# Altium PCB PCB.PcbDoc
Units mm, origin at the board's own origin, x right, y up, seen from the top; angles counter-clockwise.
Board outline 75.18 x 42.55 mm, 2 copper layers (Top Layer, Bottom Layer), stack 1.571 mm thick; 57 components, 44 nets, 199 pads, 75 vias.
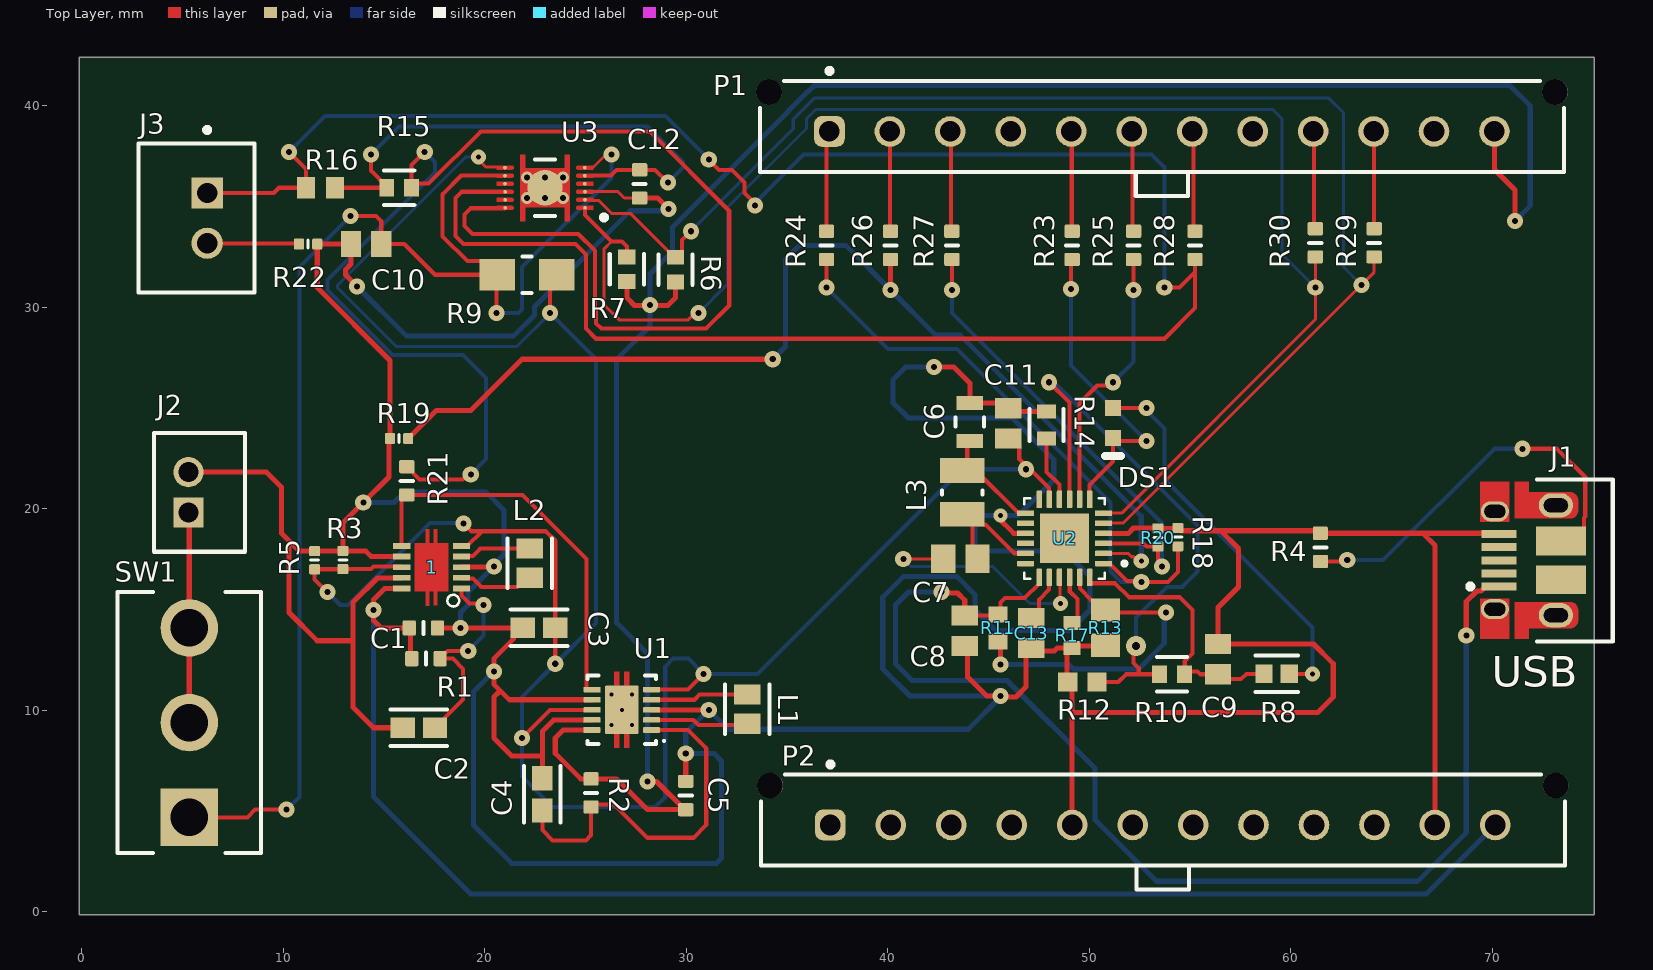
[diagram p0: Top Layer view]
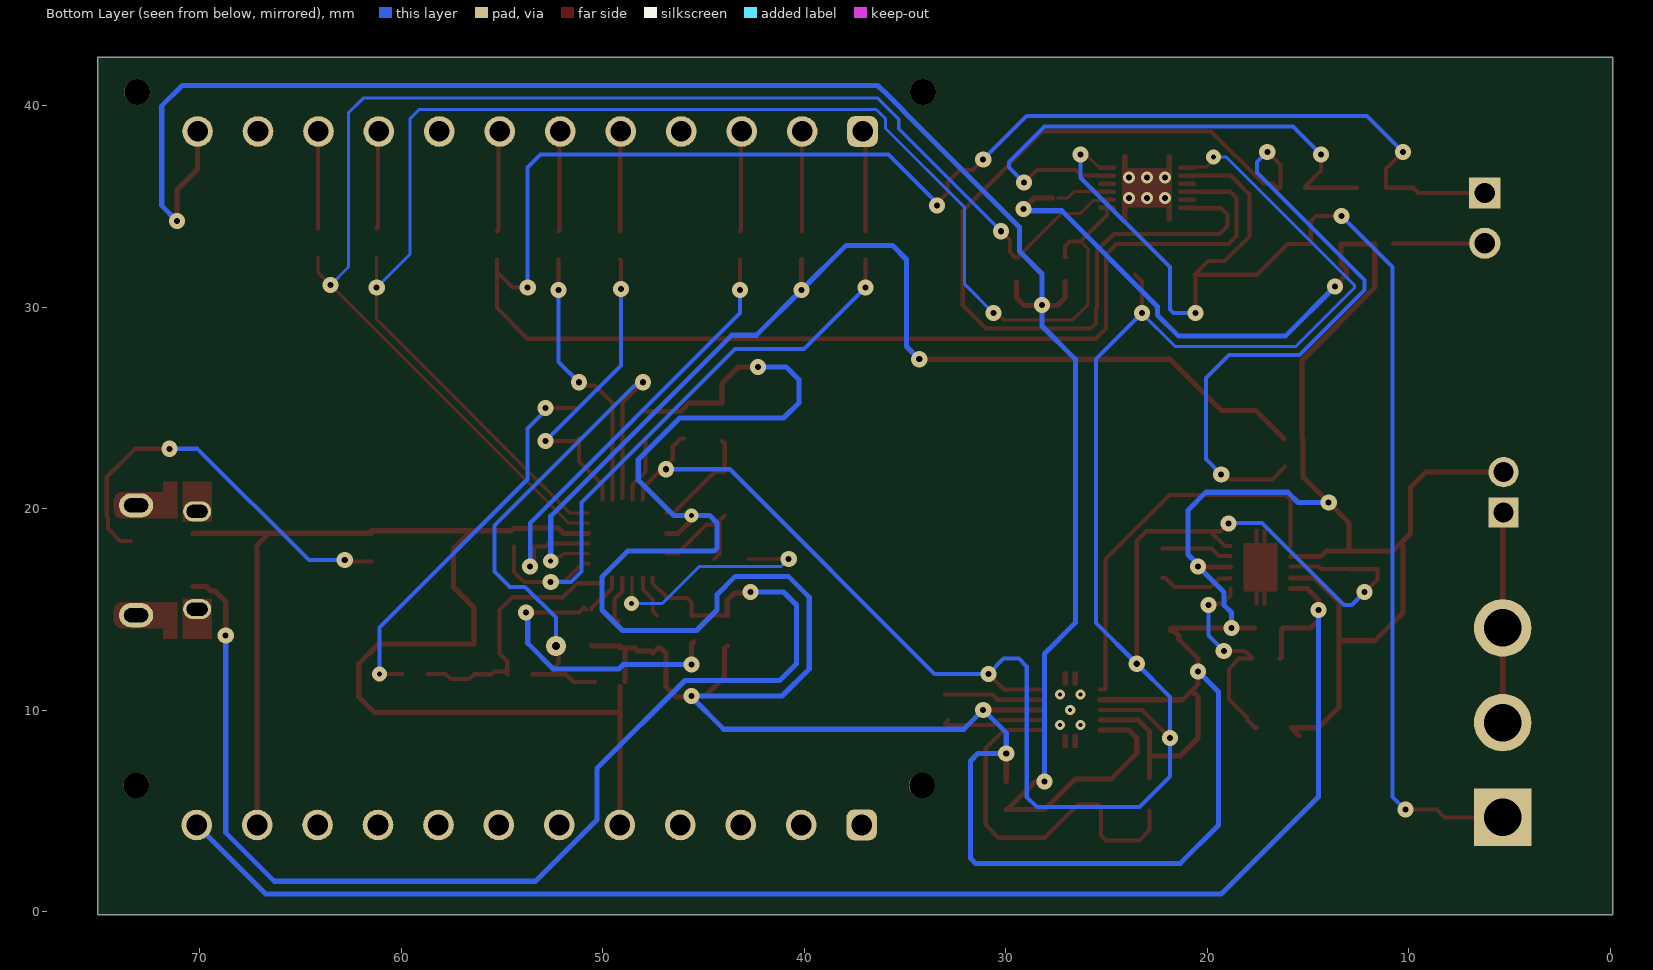
[diagram p1: Bottom Layer view, seen from below]
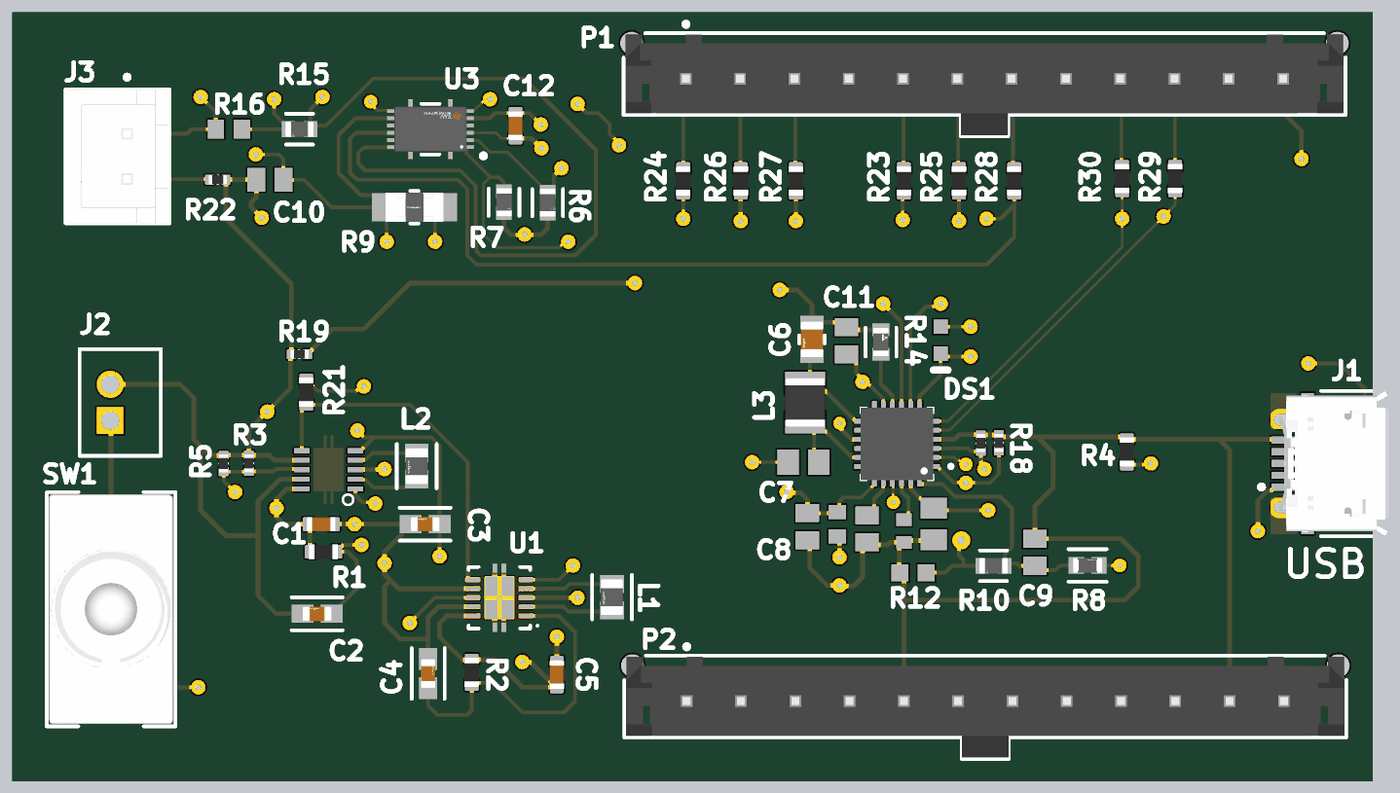
[diagram p2: 3D render of the assembled board from above, using the file's embedded part models]

## Layer stack, top to bottom
Top Solder: solder mask 0.0102, Solder Resist, Dk 3.5
Top Layer: signal copper 0.0356
Dielectric 1: core 1.5, FR-4, Dk 4.8
Bottom Layer: signal copper 0.0356
Bottom Solder: solder mask 0.0102, Solder Resist, Dk 3.5

## Board outline
-0.127,-0.127 -0.127,42.418 75.057,42.418 75.057,-0.127

## Design rules (kind name [scope] priority, off if disabled: settings)
Clearance [All] p1: gap=0.2 ignorepadtopadclearanceinfootprint=TRUE except(0.15: Track-Region SMDPad-Region)
PolygonConnect [All] p1: connectstyle=Relief reliefconductorwidth=0.254 reliefentries=4 polygonreliefangle="90 Angle" airgapwidth=0.254
RoutingVias [All] p1: holewidth=0.711 width=1.27 viastyle="Through Hole" minholewidth=0.711 minwidth=1.27 maxholewidth=0.711 maxwidth=1.27
SolderMaskExpansion [All] p1: expansion=0.102 istentingtop=FALSE
SupplyNets "Schematic Supply Nets_2" [InNet('GND')] p1: voltage=0.000
SupplyNets "Schematic Supply Nets_1" [InNet('+5V')] p2: voltage=0.000
SupplyNets "Schematic Supply Nets" [InNet('+3V3')] p3: voltage=0.000
Width [All] p1: maxlimit=0.254 minlimit=0.152 preferedwidth=0.18 minimp=50.000000 maximp=50.000000 favimp=50.000000
30 further rules are at their usual default settings.

## Components (designator, comment, footprint, x,y, rotation, side; value= is the part's Value field where it differs from the comment)
1 "TPS63002" 10SON 19.265,15.911 r90 top
C1 "Capacitor 470nF +/-20% 25V 0603" CAPC0603(1608)100_L 16.953,14.097 r180 top value=470nF
C2 "10uF" FP-GRM188-0_1-e0_2_0_55-IPC_A 16.724,9.144 r180 top
C3 "10uF" FP-GRM188-0_1-e0_2_0_55-IPC_A 22.693,14.097 r180 top
C4 "10uF" FP-GRM188-0_1-e0_2_0_55-IPC_A 22.86,5.842 r90 top
C5 "Capacitor 470nF +/-20% 25V 0603" CAPC0603(1608)100_L 29.972,5.78 r270 top value=470nF
C6 "22uF" FP-GRM21B-0_15-MFG 44.069,24.318 r270 top
C7 "33nF" CAPC2013X95X45NL10T25 43.6,17.526 r0 top
C8 "1uF" CAPC2013X135X45LL10T25 43.815,13.958 r90 top
C9 "1uF" CAPC2013X135X45LL10T25 56.388,12.547 r270 top
C10 "1uF" CAPC2013X135X45LL10T25 14.109,33.147 r0 top
C11 "1uF" CAPC2013X135X45LL10T25 45.974,24.245 r270 top
C12 "Capacitor 470nF +/-20% 25V 0603" CAPC0603(1608)100_L 27.686,36.13 r90 top value=470nF
C13 "1uF" CAPC2013X135X45LL10T25 47.117,13.843 r90 top
DS1 "HSMY-C190" AVAG-HSMX-C190_V 51.181,24.269 r270 top
J1 "10103594-0001LF" FCI-10103594-0001LF_V 71.766,17.453 r90 top
J2 "B2B-PH-K-S(LF)(SN)" JST-B2B-PH-K-S_V 5.842,20.828 r90 top
J3 "B2B-XH-A(LF)(SN)" FP-B2B-XH-A_LF_SN-MFG 5.698,34.437 r270 top
L1 "2.2uH" FP-LQM21PH_G0-IPC_C 33.02,10.069 r270 top
L2 "2.2uH" FP-LQM21PH_G0-IPC_C 22.225,17.308 r270 top
L3 "LQM2HPN1R0MJ0L" INDC2520X120X60NL20T20 43.688,20.828 r90 top value=1µH
P1 "66201211122" 66201211122 53.604,38.99 r180 top
P2 "66201211122" 66201211122 53.649,4.573 r180 top
R1 "0R3J" RESC0603(1608)_L 17.08,12.573 r0 top value=0
R2 "0R3J" RESC0603(1608)_L 25.273,5.907 r90 top value=0
R3 "10KR2F" RESC0402(1005)_L 12.954,17.468 r270 top value=10k
R4 "0R3J" RESC0603(1608)_L 61.468,18.096 r270 top value=0
R5 "10KR2F" RESC0402(1005)_L 11.557,17.457 r270 top value=10k
R6 "5.1k" FP-CRCW0603-e3-IPC_C 29.464,31.877 r270 top
R7 "5.1k" FP-CRCW0603-e3-IPC_C 27.051,31.897 r270 top
R8 "1k" FP-ERA3A-IPC_C 59.3,11.817 r0 top
R9 "0.01" FP-ERJ8CW-MFG 22.098,31.623 r0 top
R10 "5.1k" FP-CRCW0603-e3-IPC_C 54.102,11.797 r180 top
R11 "274k" RESC1608X55X30NL15T15 45.466,14.097 r90 top
R12 "7.5k" RESC1609X55X30NL10T20 49.657,11.416 r180 top
R13 "100k" RESC2013X70X40NL20T20 50.8,14.111 r90 top
R14 "500" FP-MCT0603-MFG 47.879,24.17 r90 top
R15 "5.1k" FP-CRCW0603-e3-IPC_C 15.748,35.941 r180 top
R16 "1.8M" RESC1608X55X30ML15T15 11.848,35.941 r0 top
R17 "270" RESC1608X55X30LL15T15 49.149,13.726 r270 top
R18 "10KR2F" RESC0402(1005)_L 54.398,18.597 r270 top value=10k
R19 "10KR2F" RESC0402(1005)_L 15.748,23.495 r0 top value=10k
R20 "10KR2F" RESC0402(1005)_L 53.398,18.581 r270 top value=10k
R21 "0R3J" RESC0603(1608)_L 16.129,21.398 r90 top value=0
R22 "10KR2F" RESC0402(1005)_L 11.234,33.147 r180 top value=10k
R23 "0R3J" RESC0603(1608)_L 49.149,33.082 r90 top value=0
R24 "0R3J" RESC0603(1608)_L 36.957,33.082 r90 top value=0
R25 "0R3J" RESC0603(1608)_L 52.197,33.082 r90 top value=0
R26 "0R3J" RESC0603(1608)_L 40.132,33.082 r90 top value=0
R27 "0R3J" RESC0603(1608)_L 43.18,33.082 r90 top value=0
R28 "0R3J" RESC0603(1608)_L 55.245,33.082 r90 top value=0
R29 "0R3J" RESC0603(1608)_L 64.135,33.209 r90 top value=0
R30 "0R3J" RESC0603(1608)_L 61.214,33.209 r90 top value=0
SW1 "A101SYCB04" FP-A101SYCB04-MFG 5.334,9.398 r180 top
U1 "TPS63001" DRC0010J_V 26.797,10.033 r180 top
U2 "BQ24250RGER" QFN50P400X400X100-25N 48.768,18.542 r180 top
U3 "BQ27441DRZT-G1A" FP-DRZ0012A-MFG 22.987,35.941 r90 top

## Footprints (in the part's own frame and the unit in brackets; to place one, negate y for a bottom-side part, rotate by r counter-clockwise, add the part's x,y. Pads: shape width x height; smd on the part's side, far side on the other; paste and mask are expansions set on the pad)
10SON [mm]
  rect 0.28x0.85 smd: P$1(0.14,0.43) P$2(0.67,0.43) P$3(1.2,0.43) P$4(1.73,0.43) P$5(2.25,0.43) P$6(2.25,3.39) P$7(1.73,3.39) P$8(1.2,3.39) P$9(0.67,3.39) P$10(0.14,3.39)
  Top Layer region: 3.09,1.632 2.393,1.632 2.393,1.8 3.09,1.8
  Top Layer region: 3.09,2.02 2.39,2.02 2.39,2.19 3.09,2.19
  Top Layer region: 0,1.633 -0.701,1.633 -0.701,1.8 0,1.8
  Top Layer region: 0,2.024 -0.701,2.024 -0.701,2.19 0,2.19
  Top Layer region: 2.39,1.081 0,1.081 0,2.74 2.39,2.74
  silkscreen extent -0.75,0.54 -0.17,1.12
66201211122 [mm] "3.00mm Male Single Row Vertical Header, 12p"
  rrect50% 1.52x1.52 hole 1.02: 1(16.5,0.255)
  round 1.52 hole 1.02: 2(13.5,0.255) 3(10.5,0.255) 4(7.5,0.255) 5(4.5,0.255) 6(1.5,0.255) 7(-1.5,0.255) 8(-4.5,0.255) 9(-7.5,0.255) 10(-10.5,0.255) 11(-13.5,0.255) 12(-16.5,0.255)
  round 1.27 hole 1.27 unplated: MH1(-19.5,-1.705) MH2(19.5,-1.705)
  silkscreen extent -19.95,-2.87 19.95,3.46, body extent -19.82,-2.19 19.83,3.38, height 9.93
AVAG-HSMX-C190_V [mm] "SMD, 2-Leads, Body 1.6x0.8mm, Height 0.9mm"
  rect 0.8x0.8 smd: 1(-0.75,0) 2(0.75,0)
  silkscreen extent 1.65,-0.4 1.65,0.4, body extent -0.8,-0.4 0.8,0.4, height 0.9
CAPC0603(1608)100_L [mm] "Chip Capacitor, Body 1.6x0.8mm, Height 1.0mm, IPC High Density"
  rrect25% 0.66x0.76 smd: 1(-0.7,0) 2(0.7,0)
  silkscreen extent 0,-0.3 0,0.3, body extent -0.8,-0.4 0.8,0.4, height 0.95
CAPC2013X95X45NL10T25 [mm] "Chip Capacitor, 2-Leads, Body 2.00x1.25mm, IPC Medium Density"
  rect 1.2x1.4 smd: 1(-0.85,0) 2(0.85,0)
  body extent -1.05,-0.67 1.05,0.67, height 0.95
CAPC2013X135X45LL10T25 [mm] "Chip Capacitor, 2-Leads, Body 2.00x1.25mm, IPC High Density"
  rect 1x1.3 smd: 1(-0.75,0) 2(0.75,0)
  body extent -1.05,-0.67 1.05,0.68, height 1.35
DRC0010J_V [mm] "SON, 10-Leads, Body 3x3mm, Pitch 0.5mm, Thermal Pad 2.4x1.65mm, TI Recommended"
  rrect36% 0.85x0.28 smd paste-0.025 mask+0.07: 1(-1.475,1) 2(-1.475,0.5) 3(-1.475,0) 4(-1.475,-0.5) 5(-1.475,-1) 6(1.475,-1) 7(1.475,-0.5) 8(1.475,0) 9(1.475,0.5) 10(1.475,1)
  rrect6% 1.65x2.4 smd paste-0.825 mask+0.07: 11(0,0)
  Top Layer region: -0.39,-1.9 -0.11,-1.9 -0.11,-1.2 -0.39,-1.2
  Top Layer region: 0.39,-1.2 0.11,-1.2 0.11,-1.9 0.39,-1.9
  Top Layer region: 0.39,1.9 0.11,1.9 0.11,1.2 0.39,1.2
  Top Layer region: -0.39,1.2 -0.11,1.2 -0.11,1.9 -0.39,1.9
  silkscreen extent -2.15,-1.7 1.7,1.7, body extent -1.55,-1.55 1.55,1.55, height 1
FCI-10103594-0001LF_V [mm] "SMD, 5-Leads, Body 8.04x5.62mm, Pitch 0.65 mm"
  rect 0.4x1.75 smd: 1(-1.3,1.435) 2(-0.65,1.435) 3(0,1.435) 4(0.65,1.435) 5(1.3,1.435)
  oval 1x1.4 hole 0.65 slot 1.05 at 90 deg: 6(-2.425,1.64) 7(2.425,1.64)
  oval 1.2x1.7 hole 0.7 slot 1.2 at 90 deg: 8(2.725,-1.39) 9(-2.725,-1.39)
  rect 1.425x2.5 smd: 10(-0.962,-1.64) 11(0.962,-1.64)
  Top Layer region: -3.9,0.91 -1.9,0.91 -1.9,2.37 -3.9,2.37
  Top Layer region: 3.9,2.37 1.9,2.37 1.9,0.91 3.9,0.91
  Top Layer region: -3.375,-0.04 -3.375,-2.09 -3.373,-2.129 -3.369,-2.167 -3.365,-2.185 -3.359,-2.203 -3.348,-2.239 -3.329,-2.277 -3.308,-2.312 -3.284,-2.344 -3.258,-2.374 -3.227,-2.401 -3.194,-2.426 -3.158,-2.446 -3.121,-2.464 -3.08,-2.477 -3.049,-2.483 -3.012,-2.488 -2.975,-2.49 -2.475,-2.49 -2.432,-2.488 -2.391,-2.482 -2.351,-2.471 -2.312,-2.456 -2.28,-2.439 -2.249,-2.421 -2.217,-2.397 -2.19,-2.37 -2.164,-2.342 -2.143,-2.312 -2.121,-2.277 -2.105,-2.241 -2.093,-2.209 -2.088,-2.192 -2.084,-2.175 -2.08,-2.155 -2.076,-2.134 -2.075,-2.112 -2.075,-2.09 -2.075,-0.04 -2.075,0.66 -3.9,0.66 -3.9,-0.04
  Top Layer region: 3.375,-0.04 3.375,-2.09 3.373,-2.129 3.369,-2.167 3.365,-2.185 3.359,-2.203 3.348,-2.239 3.329,-2.277 3.308,-2.312 3.284,-2.344 3.258,-2.374 3.227,-2.401 3.194,-2.426 3.158,-2.446 3.121,-2.464 3.08,-2.477 3.049,-2.483 3.012,-2.488 2.975,-2.49 2.475,-2.49 2.432,-2.488 2.391,-2.481 2.351,-2.471 2.312,-2.456 2.28,-2.439 2.249,-2.421 2.217,-2.396 2.19,-2.37 2.164,-2.342 2.143,-2.312 2.121,-2.277 2.105,-2.241 2.093,-2.209 2.088,-2.192 2.084,-2.175 2.08,-2.155 2.076,-2.134 2.075,-2.112 2.075,-2.09 2.075,-0.04 2.075,0.66 3.9,0.66 3.9,-0.04
  silkscreen extent -4.02,-4.21 4.02,2.98, body extent -4.02,-4.15 4.02,1.88, height 2.9
FP-A101SYCB04-MFG [mil]
  rect 112.37x112.37 hole 73 paste-99999 mask+0: 1(0,185)
  round 112.37 hole 73 paste-99999 mask+0: 2(0,0) 3(0,-185)
  silkscreen extent -140,-255 140,255, body extent -144,-259 144,259, height 10
FP-B2B-XH-A_LF_SN-MFG [mm]
  rect 1.55x1.55 hole 1 paste-2539.97 mask+0: 1(-1.25,0.525)
  round 1.55 hole 1 paste-2539.97 mask+0: 2(1.25,0.525)
  silkscreen extent -4.5,-2.88 3.7,2.88, body extent -3.8,-2.98 3.8,2.98, height 0.25
FP-CRCW0603-e3-IPC_C [mm]
  rect 0.735x0.862 smd paste+0 mask+0: 1(-0.615,0) 2(0.615,0)
  silkscreen extent -0.75,-0.85 0.75,0.85, body extent -1.08,-0.58 1.08,0.58, height 0.25
FP-DRZ0012A-MFG [mm]
  round 0.18 smd paste-1000 mask+0: 1(-1,-1.985) 2(-0.6,-1.985) 3(-0.2,-1.985) 4(0.2,-1.975) 5(0.6,-1.975) 6(1,-1.975) 7(1,1.985) 8(0.6,1.985) 9(0.2,1.985) 10(-0.2,1.975) 11(-0.6,1.975) 12(-1,1.975)
  round 1.755 smd paste-1000 mask+0: 13(0,0)
  Top Layer region: -1.1,-2.4 -1.1,-1.65 -1.092,-1.612 -1.071,-1.579 -1.038,-1.558 -1,-1.55 -1,-1.55 -0.962,-1.558 -0.929,-1.579 -0.908,-1.612 -0.9,-1.65 -0.9,-1.65 -0.9,-2.4
  Top Layer region: -0.7,-2.4 -0.7,-1.65 -0.692,-1.612 -0.671,-1.579 -0.638,-1.558 -0.6,-1.55 -0.6,-1.55 -0.562,-1.558 -0.529,-1.579 -0.508,-1.612 -0.5,-1.65 -0.5,-1.65 -0.5,-2.4
  Top Layer region: -0.3,-2.4 -0.3,-1.65 -0.292,-1.612 -0.271,-1.579 -0.238,-1.558 -0.2,-1.55 -0.2,-1.55 -0.162,-1.558 -0.129,-1.579 -0.108,-1.612 -0.1,-1.65 -0.1,-1.65 -0.1,-2.4
  Top Layer region: 0.1,-2.4 0.1,-1.65 0.108,-1.612 0.129,-1.579 0.162,-1.558 0.2,-1.55 0.2,-1.55 0.238,-1.558 0.271,-1.579 0.292,-1.612 0.3,-1.65 0.3,-1.65 0.3,-2.4
  Top Layer region: 0.5,-2.4 0.5,-1.65 0.508,-1.612 0.529,-1.579 0.562,-1.558 0.6,-1.55 0.6,-1.55 0.638,-1.558 0.671,-1.579 0.692,-1.612 0.7,-1.65 0.7,-1.65 0.7,-2.4
  Top Layer region: 0.9,-2.4 0.9,-1.65 0.908,-1.612 0.929,-1.579 0.962,-1.558 1,-1.55 1,-1.55 1.038,-1.558 1.071,-1.579 1.092,-1.612 1.1,-1.65 1.1,-1.65 1.1,-2.4
  Top Layer region: 1.1,2.4 1.1,1.65 1.087,1.6 1.05,1.563 1,1.55 1,1.55 0.962,1.558 0.929,1.579 0.908,1.612 0.9,1.65 0.9,1.65 0.9,2.4
  Top Layer region: 0.7,2.4 0.7,1.65 0.687,1.6 0.65,1.563 0.6,1.55 0.6,1.55 0.562,1.558 0.529,1.579 0.508,1.612 0.5,1.65 0.5,1.65 0.5,2.4
  Top Layer region: 0.3,2.4 0.3,1.65 0.287,1.6 0.25,1.563 0.2,1.55 0.2,1.55 0.162,1.558 0.129,1.579 0.108,1.612 0.1,1.65 0.1,1.65 0.1,2.4
  Top Layer region: -0.1,2.4 -0.1,1.65 -0.113,1.6 -0.15,1.563 -0.2,1.55 -0.2,1.55 -0.238,1.558 -0.271,1.579 -0.292,1.612 -0.3,1.65 -0.3,1.65 -0.3,2.4
  Top Layer region: -0.5,2.4 -0.5,1.65 -0.513,1.6 -0.55,1.563 -0.6,1.55 -0.6,1.55 -0.638,1.558 -0.671,1.579 -0.692,1.612 -0.7,1.65 -0.7,1.65 -0.7,2.4
  Top Layer region: -0.9,2.4 -0.9,1.65 -0.913,1.6 -0.95,1.563 -1,1.55 -1,1.55 -1.038,1.558 -1.071,1.579 -1.092,1.612 -1.1,1.65 -1.1,1.65 -1.1,2.4
  Top Layer region: -1.65,1.225 1.65,1.225 1.65,0.975 0.975,0.975 0.975,-0.975 1.65,-0.975 1.65,-1.225 -1.65,-1.225 -1.65,-0.975 -0.975,-0.975 -0.975,0.975 -1.65,0.975 -1.65,1.225
  silkscreen extent -1.6,-3.05 1.4,0.5, body extent -1.75,-2.5 1.75,2.5, height 0.25
FP-ERA3A-IPC_C [mm]
  rect 0.855x0.906 smd paste+0 mask+0: 1(-0.626,0) 2(0.626,0)
  silkscreen extent -1.05,-0.9 1.05,0.9, body extent -1.15,-0.6 1.15,0.6, height 0.25
FP-ERJ8CW-MFG [mm]
  rect 1.75x1.55 smd paste+0 mask+0: 1(-1.475,0) 2(1.475,0)
  silkscreen extent -0.23,-0.9 0.23,0.9, body extent -2.45,-1 2.45,1, height 0.25
FP-GRM21B-0_15-MFG [mm]
  rect 0.7x1.3 smd paste+0 mask+0: 1(-0.95,0) 2(0.95,0)
  silkscreen extent -0.23,-0.7 0.23,0.7, body extent -1.4,-0.8 1.4,0.8, height 0.25
FP-GRM188-0_1-e0_2_0_55-IPC_A [mm]
  rect 1.208x1.012 smd paste+0 mask+0: 1(-0.802,0) 2(0.802,0)
  silkscreen extent -1.41,-0.91 1.41,0.91, body extent -1.91,-1.01 1.91,1.01, height 0.25
FP-LQM21PH_G0-IPC_C [mm]
  rect 1.006x1.308 smd paste+0 mask+0: 1(-0.726,0) 2(0.726,0)
  silkscreen extent -1.23,-1.1 1.23,1.1, body extent -1.33,-0.8 1.33,0.8, height 0.25
FP-MCT0603-MFG [mm]
  rect 0.7x0.95 smd paste+0 mask+0: 1(-0.675,0) 2(0.675,0)
  silkscreen extent -0.8,-0.85 0.8,0.85, body extent -1.12,-0.58 1.12,0.58, height 0.25
INDC2520X120X60NL20T20 [mm] "Chip Inductor, 2-Leads, Body 2.70x2.20mm, IPC Medium Density"
  rect 1.23x2.22 smd: 1(-1.085,0) 2(1.085,0)
  silkscreen extent -0.1,-1.01 0.1,1.01, body extent -1.35,-1.1 1.35,1.1, height 1.2
JST-B2B-PH-K-S_V [mm] "Connector, 2-Leads, Body 5.9x4.5mm, Pitch 2mm"
  rect 1.5x1.5 hole 1: 1(-1,0.55)
  round 1.5 hole 1: 2(1,0.55)
  silkscreen extent -2.95,-2.25 2.95,2.25, body extent -2.95,-2.25 2.95,2.25, height 6
QFN50P400X400X100-25N [mm]
  rrect25% 0.86x0.27 smd: 1(-1.935,1.25) 2(-1.935,0.75) 3(-1.935,0.25) 4(-1.935,-0.25) 5(-1.935,-0.75) 6(-1.935,-1.25) 13(1.935,-1.25) 14(1.935,-0.75) 15(1.935,-0.25) 16(1.935,0.25) 17(1.935,0.75) 18(1.935,1.25)
  rrect25% 0.27x0.86 smd: 7(-1.25,-1.935) 8(-0.75,-1.935) 9(-0.25,-1.935) 10(0.25,-1.935) 11(0.75,-1.935) 12(1.25,-1.935) 19(1.25,1.935) 20(0.75,1.935) 21(0.25,1.935) 22(-0.25,1.935) 23(-0.75,1.935) 24(-1.25,1.935)
  rect 2.45x2.45 smd paste-0.45: 25(0,0)
  silkscreen extent -3.08,-2 2,2, body extent -2,-2 2,2, height 1
RESC0402(1005)_L [mm] "Chip Resistor, Body 1.0x0.5mm, IPC High Density"
  rrect25% 0.5x0.55 smd: 1(-0.45,0) 2(0.45,0)
  silkscreen extent 0,-0.2 0,0.2, body extent -0.5,-0.25 0.5,0.25, height 0.3
RESC0603(1608)_L [mm] "Chip Resistor, Body 1.6x0.8mm, IPC High Density"
  rrect25% 0.66x0.76 smd: 1(-0.7,0) 2(0.7,0)
  silkscreen extent 0,-0.3 0,0.3, body extent -0.8,-0.4 0.8,0.4, height 0.45
RESC1608X55X30LL15T15 [mm] "Chip Resistor, 2-Leads, Body 1.60x0.80mm, IPC High Density"
  rect 0.7x0.85 smd: 1(-0.625,0) 2(0.625,0)
  body extent -0.87,-0.48 0.87,0.48, height 0.55
RESC1608X55X30ML15T15 [mm] "Chip Resistor, 2-Leads, Body 1.60x0.80mm, IPC Low Density"
  rect 0.9x1.05 smd: 1(-0.725,0) 2(0.725,0)
  body extent -0.87,-0.48 0.87,0.48, height 0.55
RESC1608X55X30NL15T15 [mm] "Chip Resistor, 2-Leads, Body 1.60x0.80mm, IPC Medium Density"
  rect 0.8x0.95 smd: 1(-0.675,0) 2(0.675,0)
  body extent -0.87,-0.48 0.87,0.48, height 0.55
RESC1609X55X30NL10T20 [mm] "Chip Resistor, 2-Leads, Body 1.60x0.85mm, IPC Medium Density"
  rect 0.95x0.95 smd: 1(-0.725,0) 2(0.725,0)
  body extent -0.85,-0.48 0.85,0.48, height 0.55
RESC2013X70X40NL20T20 [mm] "Chip Resistor, 2-Leads, Body 2.00x1.25mm, IPC Medium Density"
  rect 1.15x1.45 smd: 1(-0.875,0) 2(0.875,0)
  body extent -1.1,-0.72 1.1,0.72, height 0.7

## Part data
1: library part CMP-023-000000-1, "Buck-Boost Switching Regulator IC Positive Fixed 5V 1 Output 1.6A _Switch_ 10-VFDFN Exposed Pad", Package="QFN-10 Texas Instruments", Availability=Unavailable, Component Type=Standard, Design Item ID=TPS63002, MF="Texas Instruments", MP=TPS63002, Pin Count=10, Price=None, SnapEDA_Link=https://www.snapeda.com/parts/TPS63002/Texas%20Instruments/view-part/509729/?ref=snap, Source=SnapEDAsch.SchLib
C1 C5 C12: library part CMP-001-00077-3, "Chip Capacitor, 470nF +/-20%, 25V, 0603, Thickness 1 mm", Case/Package=0603, Max Operating Temperature=85°C, Min Operating Temperature=-55°C, Tolerance=10%, Voltage Rating=25V, Mounting Technology=SMT, Pins=2
C2 C3 C4: library part CMP-2006-02792-2, "Chip Multilayer Ceramic Capacitors for General Purpose, 0603, 10uF, X5R, 15%, 20%, 6.3V", Case Code (Imperial)=0603, Case Code (Metric)=1608, Dielectric=X5R, Max Operating Temperature=85°C, Min Operating Temperature=-55°C, Package Quantity=4000, Tolerance=20%, Voltage=6.3V, Capacitance=10uF, Case/Package=0603, Depth=0.8mm, Height=0.8mm, Lead Free="Lead Free", Length=1.6mm, Material=Ceramic, Mount="Surface Mount", Packaging="Tape and Reel", Radiation Hardening=No, REACH SVHC="No SVHC", Termination=SMD/SMT, Thickness=0.035inch, Voltage Rating=6.3V, Voltage Rating (DC)=6.3V, Width=0.031inch
C6: library part CMP-2007-03385-2, "Chip Multilayer Ceramic Capacitors for General Purpose, 0805, 22uF, X5R, 15%, 20%, 6.3V", Case Code (Imperial)=0805, Case Code (Metric)=2012, Dielectric=X5R, Max Operating Temperature=85°C, Min Operating Temperature=-55°C, Package Quantity=1, Tolerance=20%, Voltage=6.3V, Capacitance=22uF, Case/Package=0805, Depth=1.25mm, Height=1.25mm, Lead Free="Lead Free", Length=2mm, Material=Ceramic, Mount="Surface Mount", Packaging="Tape and Reel", Radiation Hardening=No, REACH SVHC="No SVHC", Termination=SMD/SMT, Thickness=0.053inch, Voltage Rating=6.3V, Voltage Rating (DC)=6.3V, Width=0.049inch
C7: library part CMP-1036-04169-2, Manufacturer=Murata, Part Number=GRM219R71H333KA01D
C8 C9 C10 C11 C13: library part CMP-2007-03460-1, Manufacturer=Murata, Part Number=GRM21BR71C105KA01K
DS1: library part CMP-1744-00003-1, "LED Uni-Color Yellow, 65 mW, 20 mA, -40 to 85 degC, 2-Pin SMD, RoHS, Tape and Reel", Case Code (Imperial)=0603, Case Code (Metric)=1608, Max Operating Temperature="155 degC", Min Operating Temperature="-55 degC", Package Quantity=5000, Power Rating="100 mW", Resistance="390 Ohm", Tolerance=1%, Voltage Rating="50 V", Case\Package=0603, ComponentLink1Description="Manufacturer URL", ComponentLink1URL=http://www.avagotech.com/, ComponentLink2Description=Datasheet, ComponentLink2URL=http://docs.avagotech.com/docs/AV02-0551EN, ComponentLink3Description="Package Specification", ComponentLink3URL=http://www.fairchildsemi.com/dwg/MA/MA03D.pdf, DatasheetVersion=Mar-12, Height="0.45 mm", Length="1.6 mm", Mount="Surface Mount", PackageDescription="2-Pin Surface Mount Device, Body 1.6 x 0.8 mm, Height 0.9 mm", PackageReference=HSMX-C190, Packaging="Tape and Reel", Pins=2, REACH SVHC="No SVHC", RoHSCompliant=true, Voltage Rating (DC)="50 V", Width="0.8 mm"
J1: library part CMP-002-00038-2, "Micro USB 2.0 B Receptacle, 5 Position, Height 3.24 mm, -55 to 85 degC, RoHS, Tape and Reel", Case/Package=FCI-10103594-0001LF, Current Rating=1.8A, Manufacturer="FCI Electronics", Max Operating Temperature=85°C, Min Operating Temperature=-55°C, Package Description="5-Pin Surface Mount Device, Body 8.04 x 5.62 mm", Package Quantity=1500, Voltage Rating=100V, Connector Type=USB, Contact Material=Copper, Contact Plating=Gold, Datasheet URL=http://portal.fciconnect.com/Comergent//fci/drawing/10103594.pdf, Datasheet Version="Rev. A, 06/2010", Gender=Female, Lead Pitch=0.65mm, Manufacturer URL=http://portal.fciconnect.com/, Mounting Technology=SM, Package Reference=FCI-10103594-0001LF, Packaging=TapeandReel, Pins=5, RoHS Compliant=True
J2: library part CMP-2000-05162-1, "Male Header, Pitch 2 mm, 1 x 2 Position, Height 6 mm, Tail Length 3.4 mm, -25 to 85 degC, RoHS, Bulk", Manufacturer=JST, Datasheet URL=http://datasheet.octopart.com/B2B-PH-K-S%28LF%29%28SN%29-JST-datasheet-8324864.pdf, Datasheet Version=Nov-08, Manufacturer URL=http://www.jst.com/home2.html, No of Positions=2, Pitch=2mm, Style/Orientation=StraightHeader/Plug, Termination=Crimp, Type=ShroudedHeader
J3: library part CMP-2000-05888-3, "CONN HEADER VERT 2POS 2.5MM", Color=Natural, Contact Resistance=20mR, Current Rating=3A, Housing Color=White, Insulation Resistance=1GR, Max Operating Temperature=85°C, Max Voltage Rating (AC)=250V, Min Operating Temperature=-25°C, Connector Type="Male Pin", Contact Material=Brass, Contact Plating=Tin, Contact Type="Male Pin", Depth=5.75mm, Fastening Type=Detent, Housing Material=Polyamide, Lead Free="Lead Free", Lead Pitch=2.5mm, Length=7.4mm, Max Current Rating=3A, Max Voltage Rating (DC)=250V, Mount="Through Hole", Number of Contacts=2, Number of Positions=2, Number of Rows=1, Orientation=Straight, Packaging=Bulk, Pitch=2.5mm, REACH SVHC="No SVHC", Series=XH, Termination=Solder, Voltage Rating=250V, Voltage Rating (AC)=250V, Wire/Cable Gauge=22AWG
L1 L2: library part CMP-06042-016317-1, "Multilayer Type Inductor for Power Lines, 0805 (2012), 2.2μH, 30%, 0.288Ω, 0.8A", Case Code (Imperial)=0805, Case Code (Metric)=2012, Current Rating=800mA, DC Resistance (DCR)=288mR, Inductance Tolerance=30%, Max Operating Temperature=125°C, Min Operating Temperature=-55°C, Package Quantity=4000, Self Resonant Frequency=40MHz, Test Frequency=1MHz, Case/Package=0805, Core Material=Ferrite, DC Current=800mA, Depth=1.4mm, Height=0.9mm, Height - Seated (Max)=0.039inch, Inductance=2.2uH, Lead Free="Lead Free", Length=2mm, Max DC Current=800mA, Military Standard=Not, Mount="Surface Mount", Packaging="Tape and Reel", Radiation Hardening=No, REACH SVHC="No SVHC", RoHS Compliant=Yes, Series=LQM, Shielding=Shielded, Termination=SMD/SMT, Tolerance=30%, Width=0.049inch
L3: library part CMP-006-00008-6, "Chip Inductor, 1 uH, +/- 20%, 1 MHz, -55 to 125 degC, 1008 (2520 Metric), RoHS, Tape and Reel", Case/Package=1008, Current Rating=1.5A, Manufacturer=Murata, Max Operating Temperature=85°C, Min Operating Temperature=-40°C, Package Description="2-Pin Surface Mount Device, Body 2.5 x 2 mm", Package Quantity=3000, Resistance=0.09Ohm, Self Resonant Frequency=70MHz, Tolerance=20%, Core Material=Ferrite, Datasheet URL=http://psearch.en.murata.com/inductor/product/LQM2HPN1R0MJ0%23.pdf, Datasheet Version=Aug-16, Mounting Technology=SM, Package Reference=1008, Packaging=TapeandReel, RoHS Compliant=True, Shielding=Shielded
P1 P2: library part CMP-1502-00450-2, Color=Black, Contact Resistance=10mΩ, Current Rating=5A, Insulation Resistance=1GΩ, Max Operating Temperature=105°C, Min Operating Temperature=-40°C, Operating Supply Voltage=250V, Connector Type="Male Pin, Socket", Contact Material=Copper, Contact Plating=Tin, Fastening Type=Ramp, Gender=Male, Height=11mm, Lead Pitch=3mm, Length=39.65mm, Mount="Through Hole", NexarPartId=23024716, Number of Contacts=12, Number of Pins=12, Number of Positions=12, Number of Rows=1, Orientation=Vertical, Pitch=3mm, REACH SVHC=Unknown, RoHS=Compliant, Termination="Kinked Pin", Width=39.65mm
R1 R2 R4 R21 R23 R24 R25 R26 R27 R28 R29 R30: library part CMP-009-00063-2, "Jumper 0603 (1608 Metric)", Case/Package=0603, Mounting Technology=SMT, Pins=2
R3 R5 R18 R19 R20 R22: library part CMP-009-00066-2, "10K 0.063W 1% 0402 (1005 Metric)  SMD", Case/Package=0402, Power=63mW, Tolerance=1%, Mounting Technology=SMT, Pins=2
R6 R7 R10 R15: library part CMP-1012-00590-3, "RES Thick Film, 5.1kΩ, 1%, 0.1W, 100ppm/°C, 0603", Case Code (Imperial)=0603, Case Code (Metric)=1608, Max Operating Temperature=155°C, Min Operating Temperature=-55°C, Package Quantity=5000, Power Rating=100mW, Resistance=5.1kR, Temperature Coefficient=100ppm/°C, Tolerance=1%, Voltage Rating=75V, Case/Package=0603, Composition="Thick Film", Contact Plating=Tin, Depth=0.85mm, Height=0.45mm, Lead Free="Lead Free", Length=1.55mm, Military Standard=Not, Mount="Surface Mount", Packaging="Tape and Reel", Radiation Hardening=No, Termination=SMD/SMT, Voltage Rating (DC)=75V, Weight=7.1E-05oz, Width=0.85mm
R8: library part CMP-2000-00873-2, "RES SMD 1K OHM 0.1% 1/10W 0603", Case Code (Imperial)=0603, Case Code (Metric)=1608, Max Operating Temperature=155°C, Max Power Dissipation=100mW, Min Operating Temperature=-55°C, Package Quantity=5000, Resistance=1kR, Resistance Tolerance=0.1%, Resistor Type="Thin Film", Temperature Coefficient=25ppm/°C, Voltage Rating=75V, Case/Package=0603, Construction=Rectangular, Contact Plating=Tin, Depth=0.8mm, Height=0.45mm, Length=1.6mm, Military Standard=Not, Mount="Surface Mount", Number of Pins=2, Number of Terminations=2, Packaging="Tape and Reel", Power Rating=100mW, Radiation Hardening=No, REACH SVHC="No SVHC", RoHS Compliant=Yes, Series=ERA-3A, Size Code=0603, Technology="METAL FILM", Termination=SMD/SMT, Tolerance=0.1%, Width=0.8mm
R9: library part CMP-2003-00786-2, "RES 0.01 OHM 1% 1W 1206", Case Code (Imperial)=1206, Case Code (Metric)=3216, Max Operating Temperature=125°C, Max Power Dissipation=1W, Min Operating Temperature=-55°C, Resistance=10mR, Resistor Type="Thick Film", Temperature Coefficient=75ppm/°C, Tolerance=1%, Case/Package=1206, Depth=1.6mm, Features="Automotive AEC-Q200", Height=0.03inch, Lead Free="Lead Free", Length=3.2mm, Military Standard=Not, Mount="Surface Mount", Number of Terminations=2, Packaging="Cut Tape", Power Rating=1W, REACH SVHC="No SVHC", Termination=Flat, Width=0.063inch
R11: library part CMP-2000-00395-1, Manufacturer=Panasonic, Part Number=ERJ-3EKF2743V
R12: library part CMP-2000-03794-1, Manufacturer="Vishay Dale", Part Number=TNPW06037K50BEEA
R13: library part CMP-2001-00338-1, Manufacturer=Panasonic, Part Number=ERJ-6GEYJ104V
R14: library part CMP-02407-010017-1, "RES SMD 100 OHM 1% 1/8W 0603", Case/Package=0603, Resistance=500R, Tolerance=0.1%, Height=450um, Lead Free="Lead Free", Length=1.55mm, Width=850um
R16: library part CMP-2000-00297-1, Manufacturer=Panasonic, Part Number=ERJ-3EKF1804V
R17: library part CMP-2000-00388-1, Manufacturer=Panasonic, Part Number=ERJ3EKF2700V
SW1: library part CMP-03408-000017-1, "SWITCH TOGGLE SPDT 0.4VA 20V", Actuator Color=Chrome, Contact Current Rating=400mA, Contact Resistance=10mR, Flammability Rating="UL94 V-1", Insulation Resistance=30MR, Max Operating Temperature=85°C, Max Voltage Rating (AC)=20V, Min Operating Temperature=-30°C, Package Quantity=100, Power Rating=400mW, Actuator Length=10.41mm, Actuator Material=Phenolic, Actuator Type="Standard Round", Contact Material=Copper, Contact Plating=Gold, Depth=6.86mm, Electrical Life=6000Cycles, ELV=Compliant, Illumination Type=Non-Illuminated, Lead Free="Lead Free", Max Voltage Rating (DC)=20V, Mount=Panel, Number of Poles=1, Number of Positions=2, Orientation=Straight, Packaging=Bulk, Radiation Hardening=No, REACH SVHC="No SVHC", RoHS Compliant=Yes, Series="Gemini A", Switch Function=On-On, Termination="PC Pins", Throw Configuration=SPDT, Voltage Rating (AC)=20V, Voltage Rating (DC)=20V
U1: library part CMP-0345-00006-2, "Buck-Boost Voltage Converter with 1.8 to 5.5 V Input and 3.3 V Output, -40 to 85 degC, 10-Pin SON (DRC), Green (RoHS & no Sb/Br)", Dynamic Voltage Scaling=TRUE, Manufacturer="Texas Instruments", PartNumber=TPS63001DRCR, Switching Frequency(Max)(kHz)=1500, ComponentLink1Description=Datasheet, ComponentLink1URL=http://www.ti.com/general/docs/lit/getliterature.tsp?genericPartNumber=TPS63001&fileType=pdf, ComponentLink2Description="Package Specification", ComponentLink2URL=http://www.ti.com/litv/pdf/mpds117k, DatasheetVersion=SLVS520B, Eco-Plan="Green (RoHS & no Sb/Br)", Iout(Max)(A)=1.2, Iq(Typ)(mA)=0.03, Mounting Technology="Surface Mount", PackageDescription="10-Pin Plastic Small Outline No-Lead, 3 x 3 x 1 mm Body, 0.5 mm Pitch, Exposed Pad", PackageReference=DRC0010J, PackageVersion="revL, Sep-2011", Preset Vout(V)=3.3, Regulated Outputs(#)=1, SubFamily="Buck-Boost Regulator", Synchronous Rectification=TRUE, Topology=Buck-Boost, Vin(Max)(V)=5.5, Vin(Min)(V)=1.8, Vout(Max)(V)=3.3, Vout(Min)(V)=3.3
U2: "1-cell, 2-A, I2C controlled buck battery charger with 1uA in SYSOFF mode and TS disable function 24-VQFN", Package="VQFN-24 Texas Instruments", Availability=Unavailable, Check_prices=https://www.snapeda.com/parts/BQ24250RGER/Texas%20Instruments/view-part/85379/?ref=eda, MF="Texas Instruments", MP=BQ24250RGER, Price=None, Purchase-URL=https://pricing.snapeda.com/search/part/BQ24250RGER/?ref=eda, SnapEDA_Link=https://www.snapeda.com/parts/BQ24250RGER/Texas%20Instruments/view-part/85379/?ref=snap
U3: library part CMP-04911-000005-1, "IC BATT FUEL GAUGE LICOO2 12SON", Ambient Temperature Range High=+85°C, Ambient Temperature Range Low=-40°C, Manufacturer="Texas Instruments", Max Supply Voltage=4.5V, Min Supply Voltage=2.45V, Nominal Supply Current=93uA, Output Voltage=1.8V, Package=DRZ0012A, Temperature="-40°C to +85°C", Automotive=No, Category=IC, ComponentLink2Description=Datasheet, ComponentLink2URL=http://www.ti.com/lit/ds/symlink/bq27441-g1.pdf, Device Class L1="Integrated Circuits (ICs)", Device Class L2="Power Management ICs", Device Class L3="Battery Management", Digikey Description="IC BATT FUEL GAUGE LICOO2 12SON", Height=1mm, Lead Free=Yes, Manufacturer Part Number=BQ27441DRZT-G1A, Mouser Description="Battery Management System-Side Impdance Trck Bttry Fuel Gge", Number Of Cells=1, Number Of Outputs=1, Octopart=https://octopart.com/bq27441drzt-g1a-texas+instruments-30555831, RoHS=TRUE, Standoff Height=0mm, Temperature Range High=+85°C, Temperature Range Low=-40°C

## Via types
v1: diameter 0.8, hole 0.3, Top Layer to Bottom Layer, 58 vias
v2: diameter 0.6, hole 0.3, Top Layer to Bottom Layer, 6 vias
v3: diameter 0.5, hole 0.2, Top Layer to Bottom Layer, 5 vias
v4: diameter 0.75, hole 0.25, Top Layer to Bottom Layer, 4 vias
v5: diameter 0.7, hole 0.25, Top Layer to Bottom Layer, 1 vias
v6: diameter 1, hole 0.4, Top Layer to Bottom Layer, 1 vias

## Nets (pads, with @x,y where several pads share a name; then routed paths per layer and width w, separated by ;. In a path a pad name is that pad's centre, name@x,y a point inside that pad or via, vN(x,y) a via of type N, cw(c..) or ccw(c..) an arc to the next point about the centre after c; other vN are vias at no path point)
+3V3: C5.2 P1.12 R2.2 R6.2 R7.2 U1.10 | length 103.2
  Top Layer w0.254: U1.10 23.892,9.033 23.495,8.636 23.495,7.874 24.762,6.607 R2.2 26.54,6.607 28.067,5.08 C5.2@29.922,5.08 ; R7.2 27.051,30.48 27.432,30.099 28.175,30.099 v1(28.194,30.118) ; v1(28.067,6.477) 28.525,6.477 C5.2@29.922,5.08 ; v1@28.194,30.099 29.083,30.099 29.464,30.48 R6.2 ; C5.2 C5.2@29.922,5.08 ; P1.12 70.104,36.849 71.12,35.833 v1(71.12,34.29)
  Bottom Layer w0.254: v1(28.067,6.477) 28.067,12.827 26.543,14.351 26.543,27.432 28.194,29.083 28.194,30.099 28.194,31.661 29.318,32.785 29.318,33.978 35.099,39.76 35.099,39.788 36.051,40.74 36.079,40.74 36.36,41.021 70.866,41.021 71.882,40.005 71.882,35.052 v1(71.12,34.29)
+5V: 1.P$10 C1.2 P2.12 R1.1 | length 74.5
  Top Layer w0.254: 1.P$10 15.035,16.051 14.478,15.494 v1(14.478,14.986) 14.478,14.478 14.859,14.097 C1.2 16.316,14.034 16.316,12.636 R1.1
  Bottom Layer w0.254: v1(14.478,14.986) 14.478,5.715 19.304,0.889 66.72,0.889 P2.12
+5V_CHARGE: C8.2 J1.1 R11.2 U2.19 | length 61.3
  Top Layer w0.203: C8.2 45.57,14.708 45.593,14.685 45.593,15.36 45.808,15.575 46.781,15.575 47.518,16.312 U2.19
  Top Layer w0.254: v1(42.672,15.875) 42.711,15.836 43.453,15.836 43.815,15.474 C8.2 ; v1(68.707,13.716) 68.707,15.402 69.238,15.934 69.437,15.934 69.656,16.153 J1.1
  Bottom Layer w0.254: v1(42.672,15.875) 41.021,15.875 40.386,15.24 40.386,12.319 41.212,11.493 45.916,11.493 50.29,7.12 50.29,4.563 53.329,1.524 66.294,1.524 68.707,3.937 v1(68.707,13.716)
BAT_LOW: 1.P$6 R21.1 U1.6 | length 19.6
  Top Layer w0.203: 1.P$6 15.875,20.469 16.104,20.698 R21.1 21.868,20.698 25.049,17.517 25.049,11.071 25.087,11.033 U1.6
BIN: J3.1 R16.1 R28.1 U3.10 | length 111.2
  Top Layer w0.203: J3.1 9.525,35.687 9.779,35.941 R16.1 11.123,36.883 v1(10.287,37.719) ; U3.10 18.85,35.741 18.542,35.433 18.542,33.54 18.935,33.147 24.499,33.147 25.019,32.627 25.019,28.956 25.527,28.448 53.721,28.448 55.245,29.972 55.245,31.75 ; v1(31.115,37.338) 31.623,36.83 32.258,36.83 32.893,36.195 32.893,35.684 33.401,35.176 v1(33.401,35.052) ; v1(53.721,30.988) 54.483,30.988 55.245,31.75 ; R28.1 55.245,31.75
  Bottom Layer w0.203: v1(10.287,37.719) 12.065,39.497 28.956,39.497 v1(31.115,37.338) ; v1(33.401,35.052) 33.401,35.179 35.814,37.592 53.086,37.592 53.721,36.957 v1(53.721,30.988)
BIN_LP: P1.7 R28.2 | length 5
  Top Layer w0.203: P1.7 55.175,38.665 55.175,33.852 R28.2
CE: R18.2 R24.1 U2.1 | length 30.6
  Top Layer w0.203: v1(36.957,30.988) R24.1 ; U2.1 50.998,17.292 51.873,16.417 52.544,16.417 v1(52.578,16.383) 53.906,16.383 54.398,16.874 R18.2
  Bottom Layer w0.203: v1(36.957,30.988) 40.005,27.94 43.434,27.94 51.054,20.32 51.054,16.891 51.562,16.383 v1(52.578,16.383)
CE_LP: P1.1 R24.2 | length 5
  Top Layer w0.203: R24.2 36.957,38.588 P1.1
CHARGE: DS1.2 R23.1 U2.7 | length 15.8
  Top Layer w0.203: v1(49.085,30.924) 49.085,32.318 R23.1 ; U2.7 50.018,21.189 51.181,22.352 DS1.2 51.332,23.368 v1(52.832,23.368)
  Bottom Layer w0.203: v1(49.085,30.924) 49.085,27.114 v1(52.832,23.368)
CHARGE_LP: P1.5 R23.2 | length 5
  Top Layer w0.203: P1.5 49.127,38.713 49.127,33.804 R23.2
EN1: R19.2 R26.1 U2.2 | length 54.2
  Top Layer w0.152: U2.2 51.931,17.792 52.092,17.631 52.198,17.631 52.416,17.412 v4(52.578,17.412)
  Top Layer w0.254: R19.2 17.595,24.892 19.304,24.892 21.844,27.432 v1(34.29,27.432) ; v1(40.132,30.861) R26.1
  Bottom Layer w0.254: v1(34.29,27.432) 34.925,28.067 34.925,32.385 35.622,33.082 37.911,33.082 v1(40.132,30.861) 42.374,28.619 43.597,28.619 52.578,19.638 v4(52.578,17.412)
EN1_LP: P1.2 R26.2 | length 5
  Top Layer w0.203: P1.2 40.118,38.721 40.118,33.796 R26.2
EN2: R20.2 R27.1 U2.3 | length 23.4
  Top Layer w0.203: v1(43.18,30.861) R27.1 ; U2.3 52.683,18.292 52.844,18.131 R20.2 53.398,17.507 53.599,17.306 v1(53.599,17.144)
  Bottom Layer w0.203: v1(43.18,30.861) 43.18,29.718 53.594,19.304 53.594,17.149 v1(53.599,17.144)
EN2_LP: P1.3 R27.2 | length 5
  Top Layer w0.203: P1.3 43.142,38.697 43.142,33.82 R27.2
GND: 1.P$3 1.P$7 1.P$9 C1.1 C2.2 C3.2 C4.2 C5.1 C6.1 C8.1 C9.1 C10.1 C11.1 C12.1 C13.1 J1.5 J2.2 P2.5 P2.11 R3.1 R4.1 R5.1 R12.2 R13.1 R14.2 R17.2 R18.1 R19.1 R20.1 R22.1 U1.3 U1.7 U1.9 U2.4 U2.15 U3.3 | length 307.6
  Top Layer w0.152: U3.3 25.212,35.741 25.219,35.747 26.61,35.747 26.924,35.433 C12.1@27.432,35.433
  Top Layer w0.254: J2.2 9.16,21.828 9.906,21.082 9.906,18.796 10.414,18.288 ; v1(13.661,31.043) 13.081,31.623 13.081,31.877 13.359,32.155 C10.1 R22.1 11.684,30.988 15.298,27.374 R19.1 15.24,23.437 15.24,21.59 v1(13.97,20.32) 12.954,19.304 R3.1 ; C2.2@15.445,8.765 15.824,9.144 14.478,9.144 13.462,10.16 13.462,13.462 ; 1.P$9 14.676,16.581 13.462,15.367 13.462,13.462 ; 1.P$7 14.363,17.641 14.097,17.907 12.965,17.907 R3.1 ; C1.1 v1(18.796,14.097) C3.2@21.793,14.097 ; 1.P$3 v1@20.54,17.111 ; 20.701,10.922 20.447,10.668 20.447,8.636 21.336,7.747 22.86,7.747 ; C3.2@21.844,13.97 21.666,13.97 21.414,13.718 21.414,13.54 20.447,12.573 v1(20.447,11.938) 20.447,11.303 21.217,10.533 U1.7 ; C4.2 22.86,7.747 ; U1.9 23.423,9.533 22.86,8.97 22.86,7.747 ; C12.1@27.683,35.433 C12.1 28.578,35.43 v1(29.121,34.887) ; U1.3 v1(31.115,10.033) v1@31.369,10.033 ; C5.1 v1(29.972,7.874) ; v1(42.291,27.051) 43.269,27.051 44.069,26.251 C6.1 45.701,25.268 C11.1 46.124,24.845 R14.2 ; C8.1 43.95,13.073 43.95,11.676 44.914,10.712 v1(45.593,10.712) ; v5@45.466,19.558 45.483,19.558 46.249,18.792 U2.15 ; v1@45.593,10.668 46.355,10.668 46.863,11.176 46.863,12.846 C13.1@47.113,13.096 ; C13.1 47.267,13.093 C13.1@47.515,12.845 ; C13.1@47.625,12.954 48.26,12.954 48.407,13.101 R17.2@48.895,13.101 ; R12.2@48.895,11.453 R17.2@48.895,13.101 ; P2.5 49.149,9.906 ; R12.2@49.149,11.199 49.149,9.906 ; R17.2 R17.2@48.895,13.101 ; R17.2@49.149,13.194 50.504,13.194 R13.1@50.546,13.236 ; U2.4 51.939,18.792 52.197,19.05 ; 52.197,19.047 53.665,19.047 53.673,19.039 54.431,19.039 54.55,18.92 56.518,18.92 ; R4.1 66.548,18.796 ; R4.1@61.468,18.92 56.518,18.92 ; P2.11 67.149,18.195 66.548,18.796 ; J1.5 70.287,18.796 66.548,18.796 ; 10.414,18.288 10.795,17.907 R5.1 11.562,17.912 12.949,17.912 R3.1 ; 10.414,18.288 10.287,18.161 10.287,14.859 11.684,13.462 13.462,13.462 ; 49.149,9.906 61.341,9.906 62.103,10.668 62.103,12.319 61.125,13.297 C9.1 56.388,15.113 57.404,16.129 57.404,18.034 56.518,18.92
  Bottom Layer w0.254: v1(13.661,31.043) 16.129,28.575 21.416,28.575 22.46,29.619 22.46,30.041 27.216,34.798 29.033,34.798 v1(29.121,34.887) ; v1(13.97,20.32) 15.494,20.32 16.002,20.828 20.066,20.828 20.955,19.939 20.955,17.741 20.447,17.233 v1(20.447,17.145) 19.158,15.856 19.158,15.221 18.796,14.859 v1(18.796,14.097) ; v1@20.574,11.938 v1(20.447,11.938) 19.431,10.922 19.431,4.318 21.336,2.413 31.496,2.413 31.75,2.667 31.75,7.493 31.369,7.874 v1(29.972,7.874) 29.972,8.89 v1(31.115,10.033) 32.079,9.069 43.994,9.069 45.593,10.668 45.549,10.712 41.104,10.712 39.751,12.065 39.751,15.621 40.786,16.656 43.415,16.656 44.323,15.748 44.323,14.986 45.339,13.97 49.022,13.97 50.038,14.986 50.038,16.637 48.768,17.907 44.472,17.907 44.323,18.056 44.323,19.304 44.704,19.685 v5(45.593,19.685) 46.482,19.685 48.236,21.439 48.236,22.455 46.181,24.511 41.021,24.511 40.259,25.273 40.259,26.416 40.894,27.051 v1(42.291,27.051)
ILIM: R17.1 U2.22 | length 2.5
  Top Layer w0.203: U2.22 49.027,16.598 49.027,15.903 49.403,15.527 49.403,14.599 49.248,14.444 R17.1@49.182,14.444
INT: R25.1 U2.8 | length 13.5
  Top Layer w0.203: U2.8 49.518,25.261 50.394,26.137 51.029,26.137 v1(51.181,26.289) ; v1(52.197,30.861) R25.1
  Bottom Layer w0.203: v1@51.291,26.289 v1(51.181,26.289) 52.197,27.305 v1(52.197,30.861)
INT_LP: P1.6 R25.2 | length 5
  Top Layer w0.203: P1.6 52.151,38.689 52.151,33.828 R25.2
ISET: R14.1 U2.10 | length 3.3
  Top Layer w0.203: R14.1 47.879,21.844 48.518,21.205 U2.10
LDO: C9.2 R8.1 R10.1 U2.24 | length 13.5
  Top Layer w0.203: U2.24 50.018,16.346 50.051,16.312 51.277,16.312 51.968,15.621 54.483,15.621 55.118,14.986 55.118,12.827 54.737,12.446 R10.1@54.737,11.817 ; R10.1 R10.1@54.737,11.817 ; R8.1 57.791,11.817 57.531,11.557 56.628,11.557 C9.2 55.513,11.797 55.372,11.938 54.858,11.938 R10.1@54.737,11.817
Net1_P$1: 1.P$1 C2.1 R1.2 | length 10.7
  Top Layer w0.203: C2.1 17.624,9.144 18.029,9.548 18.029,9.647 18.923,10.541 18.923,12.065 18.415,12.573 R1.2 17.78,12.623 18.009,12.851 18.058,12.851 18.161,12.954 v1(19.177,12.954) ; 1.P$1 18.835,15.709 19.234,15.31 19.869,15.31 v1(19.939,15.24)
  Bottom Layer w0.203: v1(19.177,12.954) 19.939,13.716 v1(19.939,15.24)
Net1_P$2: 1.P$2 L2.2 | length 3.8
  Top Layer w0.203: 1.P$2 18.869,16.547 19.407,16.547 19.825,16.129 21.621,16.129 22.074,16.582 L2.2
Net1_P$4: 1.P$4 L2.1 | length 3.6
  Top Layer w0.203: 1.P$4 18.859,17.665 19.407,17.665 19.776,18.034 L2.1
NetC4_1: C4.1 R2.1 U1.1 | length 18.7
  Top Layer w0.203: C4.1 22.86,4.064 23.368,3.556 25.019,3.556 25.273,3.81 R2.1 25.4,5.334 26.416,5.334 28.067,3.683 30.353,3.683 30.988,4.318 30.988,8.128 30.083,9.033 U1.1
NetC7_1: C7.1 U2.21 | length 12
  Top Layer w0.152: v1(40.767,17.526) C7.1 ; U2.21 48.544,16.581 48.544,15.337 v4(48.57,15.311)
  Bottom Layer w0.152: v1(40.767,17.526) 41.149,17.145 45.212,17.145 47.046,15.311 v4(48.57,15.311)
NetC12_2: C12.2 R15.2 R16.2 U3.5 | length 26.7
  Top Layer w0.203: R16.2 R15.2@15.113,35.941 ; v1(14.351,37.592) 14.351,36.786 15.133,36.005 R15.2 ; 25.387,36.541 26.254,36.541 26.543,36.83 C12.2 28.448,36.83 v1(29.083,36.195)
  Bottom Layer w0.203: v1(14.351,37.592) 15.748,38.989 28.067,38.989 29.845,37.211 29.845,36.957 v1(29.083,36.195)
NetDS1_1: DS1.1 R8.2 | length 19.4
  Top Layer w0.203: DS1.1 v1(52.832,25.019) ; R8.2 v4(61.081,11.817) v4@61.087,11.811
  Bottom Layer w0.203: v1(52.832,25.019) 52.832,24.892 53.721,24.003 53.721,21.475 61.081,14.115 v4(61.081,11.817)
NetJ1_11: J1.11 R4.2 | length 20.1
  Top Layer w0.203: R4.2 62.735,17.396 v1(62.8,17.461) v1@62.865,17.526 ; v1(71.501,22.987) 73.205,22.987 74.612,21.58 74.612,19.623 74.554,19.566 74.554,19.026 73.943,18.415 J1.11
  Bottom Layer w0.203: v1(62.8,17.461) 64.578,17.461 70.104,22.987 v1(71.501,22.987)
NetJ2_1: J2.1 SW1.2 SW1.3 | length 10.4
  Top Layer w0.254: J2.1 5.334,19.786 SW1.3 SW1.2
NetJ3_2: J3.2 R22.2 | length 4.6
  Top Layer w0.203: J3.2 6.243,33.167 10.764,33.167 R22.2
NetL1_1: L1.1 U1.4 | length 4.9
  Top Layer w0.203: U1.4 30.398,10.533 30.66,10.795 L1.1
NetL1_2: L1.2 U1.2 | length 5.2
  Top Layer w0.203: U1.2 30.345,9.533 30.607,9.271 32.948,9.271 L1.2 L1.2@32.83,9.533
NetR11_1: R11.1 R13.2 U2.23 | length 16.8
  Top Layer w0.203: U2.23 49.527,16.598 49.527,16.049 50.117,15.459 50.177,15.459 50.546,15.09 R13.2@50.546,14.986 ; R13.2 50.927,15.113 51.175,14.865 v1(53.811,14.865)
  Top Layer w0.254: R11.1 45.593,13.295 v1(45.593,12.274)
  Bottom Layer w0.254: v1(45.593,12.274) 48.991,12.274 49.201,12.065 52.451,12.065 53.721,13.335 53.721,14.776 v1(53.811,14.865)
NetR15_1: R15.1 R21.2 U3.12 | length 73.3
  Top Layer w0.203: R21.2 16.764,21.463 18.889,21.463 19.143,21.717 v1(19.304,21.717) ; R15.1 16.363,37.064 v1(17.018,37.719) ; R15.1@16.471,35.878 16.737,36.143 17.209,36.143 19.8,38.735 28.194,38.735 32.131,34.798 32.131,30.099 30.988,28.956 25.781,28.956 25.527,29.21 25.527,29.92 25.476,29.971 25.476,32.817 24.638,33.655 19.38,33.655 18.999,34.036 18.999,34.62 19.304,34.925 20.996,34.925 U3.12
  Bottom Layer w0.203: v1(17.018,37.719) 17.526,37.211 17.526,36.703 12.192,31.369 12.192,30.869 15.425,27.635 18.923,27.635 20.066,26.492 20.066,22.479 v1(19.304,21.717)
PACK+: C10.2 R9.1 SW1.1 U3.6 U3.8 | length 67.6
  Top Layer w0.152: 25.362,36.973 25.394,36.973 26.013,37.592 v1(26.278,37.592)
  Top Layer w0.203: SW1.1 8.219,4.699 8.6,5.08 v1(10.16,5.08) ; v1(13.335,34.544) 14.605,34.544 14.859,34.29 C10.2 16.002,33.147 17.526,31.623 R9.1 ; v1(20.574,29.718) 20.574,31.574 R9.1 ; 20.612,36.541 18.831,36.541 17.907,35.617 17.907,33.528 19.139,32.296 19.95,32.296 R9.1
  Bottom Layer w0.203: v1(10.16,5.08) 10.795,5.715 10.795,32.004 v1(13.335,34.544) ; v1(20.574,29.718) 21.67,29.718 21.844,29.892 21.844,32.004 26.278,36.438 v1(26.278,37.592)
PACK+_OUT: 1.P$5 1.P$8 C3.1 C11.2 R3.2 R5.2 R9.2 U1.5 U1.8 U2.11 U3.7 | length 125.8
  Top Layer w0.152: v4(19.685,37.465) 19.685,37.338 20.05,36.973 20.612,36.973
  Top Layer w0.203: v1(12.192,15.875) 11.557,16.51 R5.2 12.943,17.007 R3.2 14.351,17.018 14.478,17.145 15.841,17.145 1.P$8 ; 1.P$5 19.12,18.161 19.852,18.893 ; v1(18.949,19.278) 19.334,18.893 19.852,18.893 ; v1(21.844,8.636) 23.241,10.033 U1.8 ; v1(23.241,29.718) 23.241,31.291 R9.2 ; v1(23.495,12.319) C3.1 23.495,18.424 23.026,18.893 19.852,18.893 ; U1.5 30.083,11.033 v1(30.861,11.811) ; C11.2 46.124,23.495 46.522,23.097 46.522,22.473 46.863,22.132 v1(46.863,21.971) 46.977,21.857 47.186,21.857 48.009,21.035 48.009,20.486 U2.11
  Bottom Layer w0.152: v4(19.685,37.465) 19.05,37.465 12.691,31.106 12.691,30.98 15.604,28.067 21.59,28.067 v1(23.241,29.718)
  Bottom Layer w0.203: v1(12.192,15.875) 12.827,15.24 13.208,15.24 17.272,19.304 18.923,19.304 v1(18.949,19.278) ; v1(23.241,29.718) 25.527,27.432 25.527,14.351 v1(23.495,12.319) 21.844,10.668 v1(21.844,8.636) 21.844,6.731 23.368,5.207 28.448,5.207 28.956,5.715 28.956,12.192 29.337,12.573 30.099,12.573 v1(30.861,11.811) 33.528,11.811 43.688,21.971 v1(46.863,21.971)
PMID: C13.2 U2.20 | length 2.2
  Top Layer w0.203: C13.2@47.301,14.719 47.498,14.916 47.498,15.494 48.009,16.005 48.009,16.598 U2.20
SCL: R7.1 R30.1 U2.6 U3.1 | length 74.6
  Top Layer w0.152: 26.289,33.274 25.908,32.893 25.908,30.15 26.67,29.388 30.102,29.388 30.432,29.718 v1(30.607,29.718) ; U2.6 51.602,19.792 61.214,29.404 v1(61.214,30.988) R30.1
  Top Layer w0.203: U3.1 24.972,34.591 26.289,33.274 26.797,33.274 27.051,33.02 R7.1 R7.1@26.987,32.512
  Bottom Layer w0.152: v1(30.607,29.718) 32.036,31.147 32.036,34.957 35.963,38.884 35.963,39.358 36.43,39.825 59.108,39.825 59.563,39.37 59.563,32.639 v1(61.214,30.988)
SCL_LP: P1.9 R30.2 | length 4.9
  Top Layer w0.203: P1.9 61.159,38.68 61.159,33.964 R30.2
SDA: R6.1 R29.1 U2.5 U3.2 | length 71
  Top Layer w0.152: 25.273,35.306 25.654,35.306 26.289,34.671 27.222,34.671 29.127,32.766 R6.1@29.21,32.766 ; U2.5 50.715,19.304 51.689,19.304 v1(63.5,31.115) 64.135,31.75 R29.1
  Top Layer w0.203: R6.1@29.135,32.758 29.4,32.492 R6.1 29.528,32.492 29.793,32.758 29.793,33.349 v1(30.226,33.782)
  Bottom Layer w0.152: v1(30.226,33.782) 35.306,38.862 35.306,39.348 36.344,40.386 61.887,40.386 62.611,39.662 62.611,32.004 v1(63.5,31.115)
SDA_LP: P1.10 R29.2 | length 4.8
  Top Layer w0.203: P1.10 64.12,38.72 64.12,33.924 R29.2
SW: C7.2 L3.1 U2.17 | length 6
  Top Layer w0.203: C7.2 44.196,17.78 44.196,19.42 43.942,19.674 44.386,19.23 44.847,19.23 45.613,18.464 46.275,17.801 46.824,17.801 U2.17
SYS: C6.2 L3.2 U2.13 | length 5.3
  Top Layer w0.203: C6.2 43.942,23.241 43.942,21.844 44.437,21.844 46.456,19.825 46.8,19.825 U2.13
TS: R10.2 R12.1 U2.9 | length 28.7
  Top Layer w0.203: v1(48.006,26.289) 49.018,25.277 49.018,20.551 U2.9@49.027,20.542 ; R12.1 51.435,11.416 51.816,11.797 52.451,11.797 ; v6@52.197,12.954 52.197,12.352 52.451,12.098 52.451,11.797 ; R10.2 52.451,11.797
  Bottom Layer w0.203: v1(48.006,26.289) 48.222,26.289 48.46,26.05 48.499,26.05 55.372,19.177 55.372,16.891 54.61,16.129 53.848,16.129 52.324,14.605 v6(52.324,13.208)
pads on no net: J1.2 J1.3 J1.4 J1.6 J1.7 J1.8 J1.9 J1.10 P1.4 P1.8 P1.11 P1.MH1 P1.MH2 P2.1 P2.2 P2.3 P2.4 P2.6 P2.7 P2.8 P2.9 P2.10 P2.MH1 P2.MH2 U1.11 U2.12 U2.14 U2.16 U2.18 U2.25 U3.4 U3.9 U3.11 U3.13
copper on no net:
  other v2: 22.087,35.441 22.987,35.441 23.887,35.441 22.087,36.441 22.987,36.441 23.887,36.441
  other v3: 26.297,9.283 27.297,9.283 26.797,10.033 26.297,10.783 27.297,10.783

## Silkscreen, mask and mechanical layers (free items; w line width, h text height)
Top Overlay:
  text "USB" at 69.977,11.176 h1.52
Mechanical 1:
  lines w0.254: 0,0 74.93,0 74.93,42.291 0,42.291 0,0

## Text inside footprints (layer, text, board x,y; h text height)
J1: Mechanical 1 "PCB Edge" at 74.596,21.878 h0.75 r90